# Altium PCB AlarmTimer_Layout.PcbDoc
Units mil, origin at the board's own origin, x right, y up, seen from the top; angles counter-clockwise.
Board outline 3149.61 x 2362.2 mil, 2 copper layers (Top Layer, Bottom Layer), stack 42.17 mil thick; 26 components, 22 nets, 95 pads, 5 vias.
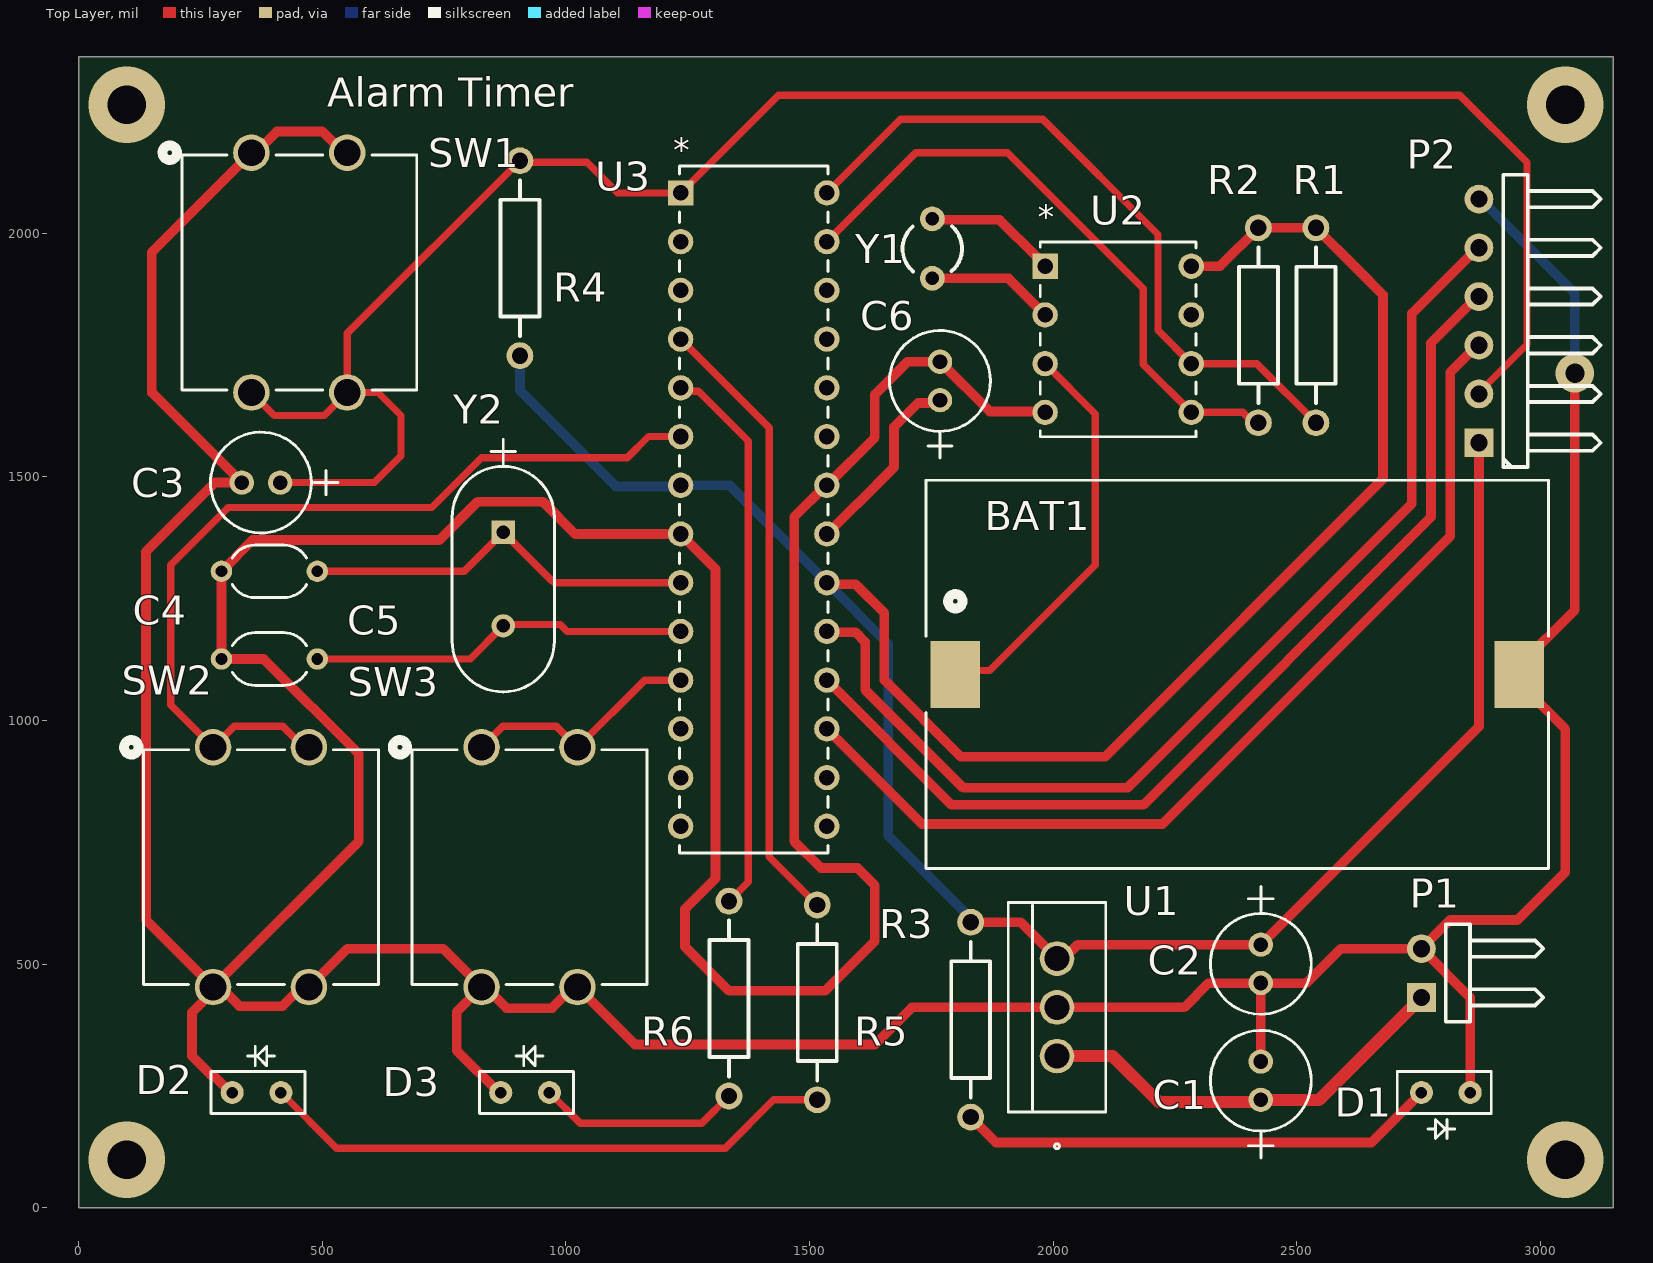
[diagram p0: Top Layer view]
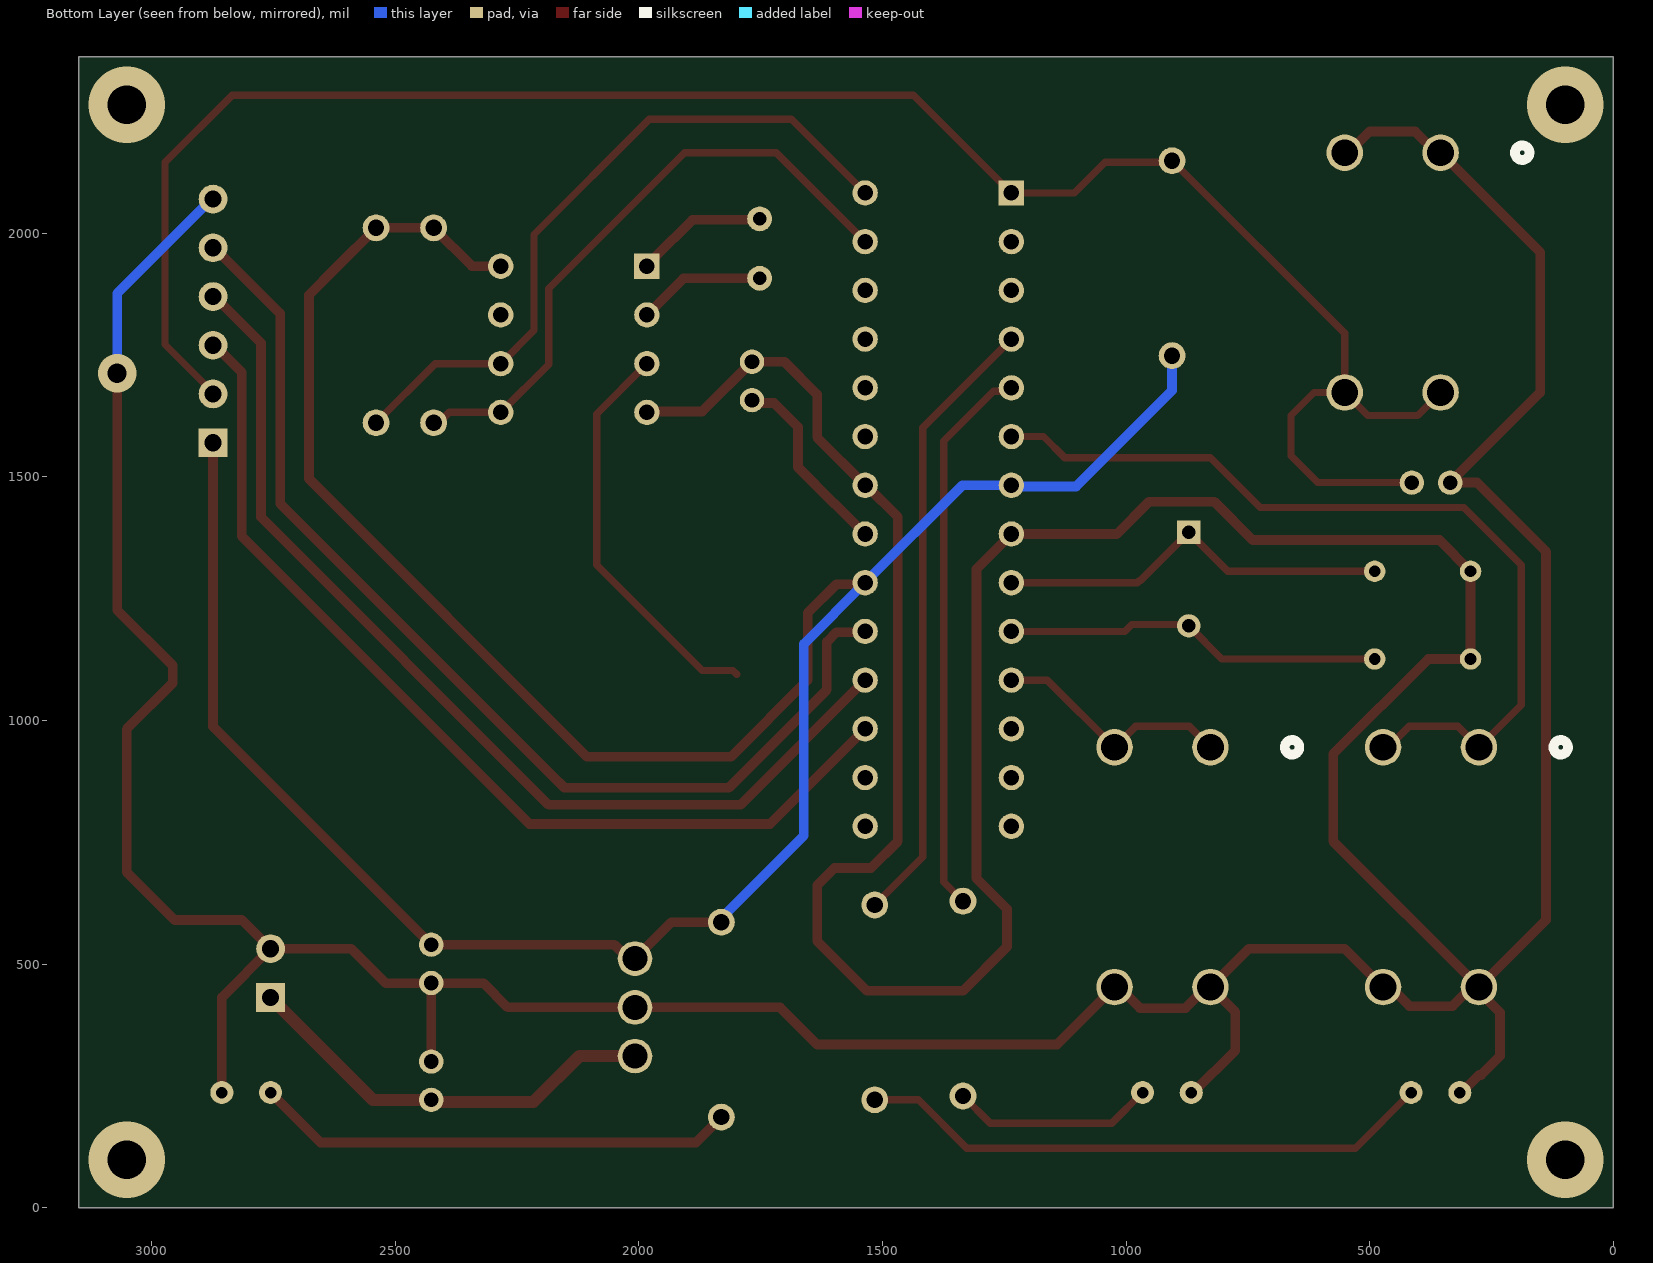
[diagram p1: Bottom Layer view, seen from below]
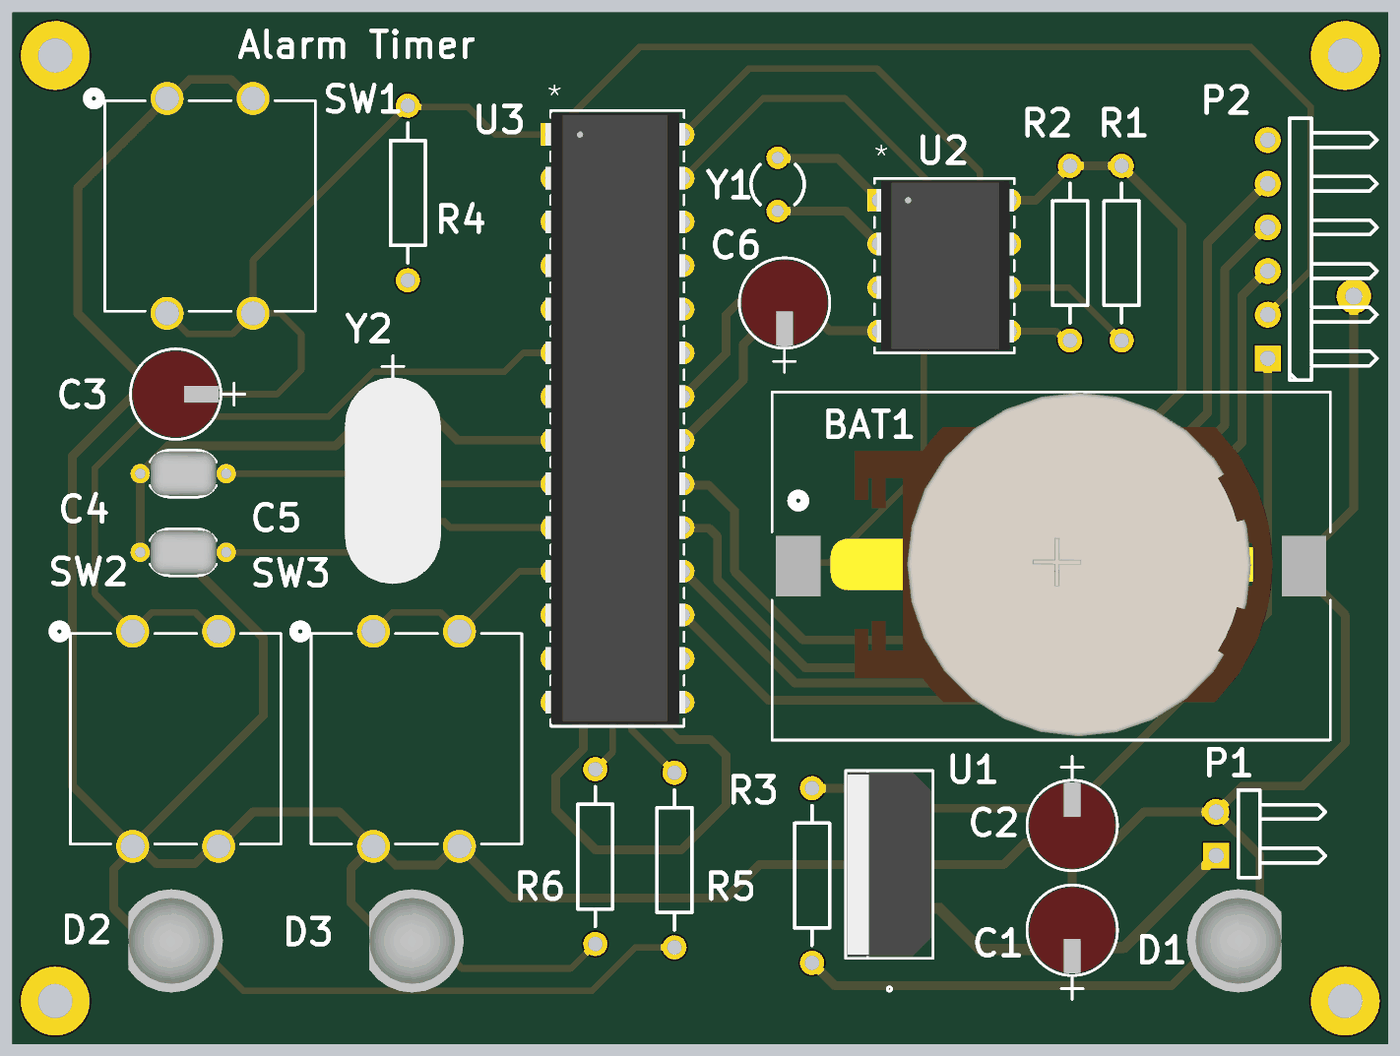
[diagram p2: 3D render of the assembled board from above, using the file's embedded part models]

## Layer stack, top to bottom
Top Solder: solder mask 0.4, Solder Resist, Dk 3.5
Top Layer: signal copper 1.4
Dielectric 1: dielectric 39.3701, FR-4, Dk 4.8
Bottom Layer: signal copper 1.4
Bottom Solder: solder mask 0.4, Solder Resist, Dk 3.5

## Board outline
0,0 3149.61,0 3149.61,2362.2 0,2362.2

## Design rules (kind name [scope] priority, off if disabled: settings)
Clearance [All] p1: gap=8 ignorepadtopadclearanceinfootprint=TRUE
PolygonConnect [All] p1: connectstyle=Relief reliefconductorwidth=10 reliefentries=4 polygonreliefangle="90 Angle" airgapwidth=10
RoutingVias [All] p1: holewidth=28 width=50 viastyle="Through Hole" minholewidth=28 minwidth=50 maxholewidth=118.11 maxwidth=196.85
SolderMaskExpansion [All] p1: expansion=4 istentingtop=FALSE
Width Width_1 [InNet('5V') or InNet('GND') or InNet('VCC')] p1: maxlimit=30 minlimit=15 preferedwidth=20
Width [All] p2: maxlimit=20 minlimit=10 preferedwidth=15 minimp=50.000000 maximp=50.000000 favimp=50.000000
30 further rules are at their usual default settings.

## Components (designator, comment, footprint, x,y, rotation, side; value= is the part's Value field where it differs from the comment)
BAT1 "CR2032" BAT_SMTU2032_RNB 1799.21,1094.49 r0 top
C1 "300nF" CAP_UEP_5X11_NCH 2426.26,221.06 r90 top
C2 "100nF" CAP_UEP_5X11_NCH 2426.26,539.8 r270 top
C3 "100nF" CAP_UEP_5X11_NCH 413.39,1488.19 r180 top
C4 "22pF" CAP_FA28_TDK 391.26,1306.06 r0 top
C5 "22pF" CAP_FA28_TDK 391.26,1126.06 r0 top
C6 "100nF" CAP_UEP_5X11_NCH 1767.72,1657.48 r90 top
D1 "PowerLED" LED 2855.91,236.22 r180 top
D2 "AlarmLED" LED 314.96,236.22 r0 top
D3 "SnoozeLED" LED 866.14,236.22 r0 top
P1 "Power Conector" HDR1X2H 2755.91,431.5 r90 top
P2 "USBASP Connector" HDR1X6H 2874.02,1570.08 r90 top
R1 "10k" AXIAL-0.4 2539.37,1811.02 r270 top
R2 "10k" AXIAL-0.4 2421.26,1811.02 r270 top
R3 "" AXIAL-0.4 1830.71,385.83 r270 top value=330R
R4 "" AXIAL-0.4 905.51,1948.82 r270 top value=10k
R5 "" AXIAL-0.4 1515.75,421.26 r270 top value=220R
R6 "" AXIAL-0.4 1334.65,429.13 r270 top value=220R
SW1 "TL1100FF160Q" TL1100F 354.33,2165.35 r0 top
SW2 "TL1100FF160Q" TL1100F 275.59,944.88 r0 top
SW3 "TL1100FF160Q" TL1100F 826.77,944.88 r0 top
U1 "LM7805" TO-220_FAS 2007.87,311.02 r90 top
U2 "DS1307" 21-0043D_8_MXM 1983.46,1932.28 r0 top
U3 "ATMEGA328-PU" 28P3_SPDIP28_SP_MCH 1235.43,2082.68 r0 top
Y1 "XTAL" R38 1751.97,1968.5 r0 top
Y2 "16MHz" XTAL_ABL_ABR 871.26,1386.06 r270 top

## Footprints (in the part's own frame and the unit in brackets; to place one, negate y for a bottom-side part, rotate by r counter-clockwise, add the part's x,y. Pads: shape width x height; smd on the part's side, far side on the other; paste and mask are expansions set on the pad)
21-0043D_8_MXM [mil]
  rect 52x52 hole 32 mask+0: 1(0,0)
  round 52 hole 32 mask+0: 2(0,-100) 3(0,-200) 4(0,-300) 5(300,-300) 6(300,-200) 7(300,-100) 8(300,0)
  silkscreen extent -10,-350 310,50, body extent -5,-345 310,45, height 185
28P3_SPDIP28_SP_MCH [mil]
  rect 52x52 hole 32 mask+0: 1(0,0)
  round 52 hole 32 mask+0: 2(0,-100) 3(0,-200) 4(0,-300) 5(0,-400) 6(0,-500) 7(0,-600) 8(0,-700) 9(0,-800) 10(0,-900) 11(0,-1000) 12(0,-1100) 13(0,-1200) 14(0,-1300) 15(300,-1300) 16(300,-1200) 17(300,-1100) 18(300,-1000) 19(300,-900) 20(300,-800) 21(300,-700) 22(300,-600) 23(300,-500) 24(300,-400) 25(300,-300) 26(300,-200) 27(300,-100) 28(300,0)
  silkscreen extent -2,-1355 302,55, body extent -15,-1350 304,50, height 205
AXIAL-0.4 [mm] "Axial Device, Thru-Hole; 2 Leads; 0.4 in Pin Spacing"
  round 1.4 hole 0.85: 1(-5.08,0) 2(5.08,0)
  silkscreen extent -4.06,-1.02 4.06,1.02
BAT_SMTU2032_RNB [mil]
  rect 102x138 smd paste+0 mask+0: 1(0,0) 2(1157.48,0)
  silkscreen extent -60,-398 1218,398, body extent 0,-390 1086,397, height 236
CAP_FA28_TDK [mil]
  round 44 hole 24 mask+0: 1(-98.43,0) 2(98.43,0)
  silkscreen extent -76,-54 76,54, body extent -75,-50 75,50, height 243
CAP_UEP_5X11_NCH [mil]
  round 50 hole 30 mask+0: 1(0,0) 2(78.74,0)
  silkscreen extent -119,-104 143,103, body extent -60,-98 138,98, height 493
HDR1X2H [mm] "Connector; Header; 2 Position; Right Angle"
  rect 1.5x1.5 hole 0.9: 1(0,0)
  round 1.5 hole 0.9: 2(2.54,0)
  silkscreen extent -1.27,-6.35 3.81,-1.27
HDR1X6H [mm] "Connector; Header; 6 Position; Right Angle"
  rect 1.5x1.5 hole 0.9: 1(0,0)
  round 1.5 hole 0.9: 2(2.54,0) 3(5.08,0) 4(7.62,0) 5(10.16,0) 6(12.7,0)
  silkscreen extent -1.27,-6.35 13.97,-1.27
LED [mm]
  round 1.2 hole 0.6: 1(0,0) 2(2.54,0)
  silkscreen extent -1.1,-1.1 3.8,2.4, body extent -1.25,-3 4.25,3, height 8.94
R38 [mm] "Crystal, Thru-Hole; 2 Leads; Body 3.1 x 8.2 mm (Dia.xH)"
  round 1.3 hole 0.7: 1(0,1.55) 2(0,-1.55)
  silkscreen extent -1.55,-1.19 1.55,1.17
TL1100F [mil]
  round 75 hole 55 mask+0: 1(0,0) 2(0,-492.13) 3(196.85,0) 4(196.85,-492.13)
  silkscreen extent -183,-487 339,15, body extent -141,-531 331,21, height 329
TO-220_FAS [mil]
  round 71 hole 51 mask+0: 1(0,0) 2(100,0) 3(200,0)
  silkscreen extent -190,-100 315,100, body extent -110,-95 310,95, height 650
XTAL_ABL_ABR [mil]
  rect 48x48 hole 28 mask+0: 1(0,0)
  round 48 hole 28 mask+0: 2(192,0)
  silkscreen extent -190,-105 328,105, body extent -141,-110 332,110, height 138

## Part data
BAT1: library part SMTU2032, "No Description Available", Built_By=EMA_Justin, Copyright="Copyright (C) 2018 Accelerated Designs. All rights reserved", Datasheet=https://www.mouser.com/datasheet/2/346/SMTU2032-C-258020.pdf, Manufacturer_Part_Number=SMTU2032, RefDes=RefDes, SourceLibrary=Add_to_database_2020-12-24, Type=DEV, Vendor="Renata Batteries"
C1 C2 C3 C6: library part "Cap Pol", "No Description Available", Manufacturer_Part_Number=UFW2A0R1MDD1TD, Built_By=EMA_Cory, Copyright="Copyright (C) 2018 Accelerated Designs. All rights reserved", RefDes=RefDes, SourceLibrary=Nichicon_2019-09-13, Type=DEV, Vendor=Nichicon
C4 C5: library part FA28C0G1H220JNU00, "No Description Available", Built_By=EMA_Matt, Copyright="Copyright (C) 2018 Accelerated Designs. All rights reserved", Manufacturer_Part_Number=FA28C0G1H220JNU00, RefDes=RefDes, SourceLibrary=TDK_2019-10-09, Type=DEV, Vendor=TDK
D1 D2 D3: library part LED
P1: library part "Header 2H", "Header, 2-Pin, Right Angle", LatestRevisionDate=17-Jul-2002, LatestRevisionNote="Re-released for DXP Platform.", Publisher="Altium Limited"
P2: library part "Header 6H", "Header, 6-Pin, Right Angle", LatestRevisionDate=17-Jul-2002, LatestRevisionNote="Re-released for DXP Platform.", Publisher="Altium Limited"
R1 R2 R3 R4 R5 R6: library part Res2, "Resistor", LatestRevisionDate=17-Jul-2002, LatestRevisionNote="Re-released for DXP Platform.", PackageDescription="Axial Device, Thru-Hole; 2 Leads; 0.4 in Pin Spacing", PackageReference=AXIAL-0.4, Published=8-Jun-2000, Publisher="Altium Limited"
SW1 SW2 SW3 U3: "No Description Available", Built_By=EMA_Cory, Copyright="Copyright (C) 2018 Accelerated Designs. All rights reserved", RefDes=RefDes, Type=DEV
  SW1 SW2 SW3: Datasheet=https://sten-eswitch-13110800-production.s3.amazonaws.com/system/asset/product_line/data_sheet/143/TL1100.pdf, Manufacturer_Part_Number=TL1100FF160Q, SourceLibrary=E-Switch_2020-03-31, Vendor=E-Switch
  U3: Datasheet=https://ww1.microchip.com/downloads/en/DeviceDoc/ATmega48A-PA-88A-PA-168A-PA-328-P-DS-DS40002061B.pdf, Manufacturer_Part_Number=ATMEGA328-PU, SourceLibrary=Update_to_database_2021-05-13, Vendor=Microchip
U1: library part LM7805CT, "No Description Available", Built_By=EMA_UL_Team, Copyright="Copyright (C) 2018 Accelerated Designs. All rights reserved", Manufacturer_Part_Number=LM7805CT, RefDes=RefDes, SourceLibrary=Fairchild_2008-01-01_, Type=DEV, Vendor="Fairchild Semiconductor"
U2: library part DS1307+, "No Description Available", Built_By=EMA_UL_Team, Copyright="Copyright (C) 2018 Accelerated Designs. All rights reserved", Manufacturer_Part_Number=DS1307+, RefDes=RefDes, SourceLibrary=Maxim_2011-05-13, Type=DEV, Vendor="Maxim Integrated Products"
Y1: "Crystal Oscillator", LatestRevisionDate=17-Jul-2002, LatestRevisionNote="Re-released for DXP Platform.", PackageDescription="Crystal, Thru-Hole; 2 Leads; Body 3.1 x 8.2 mm (Dia.xH)", PackageReference=R38, Published=8-Jun-2000, Publisher="Altium Limited"
Y2: "No Description Available", Manufacturer_Part_Number=ABL-20.000MHZ-B2, Built_By=EMA_Cory, Copyright="Copyright (C) 2018 Accelerated Designs. All rights reserved", Datasheet=https://abracon.com/Resonators/ABL.pdf, RefDes=RefDes, SourceLibrary=Add_to_database_2020-12-08, Type=DEV, Vendor=Abracon

## Via types
v1: diameter 157.48, hole 78.74, Top Layer to Bottom Layer, 4 vias
v2: diameter 78.74, hole 39.37, Top Layer to Bottom Layer, 1 vias

## Nets (pads, with @x,y where several pads share a name; then routed paths per layer and width w, separated by ;. In a path a pad name is that pad's centre, name@x,y a point inside that pad or via, vN(x,y) a via of type N, cw(c..) or ccw(c..) an arc to the next point about the centre after c; other vN are vias at no path point)
5V: C2.1 P2.1 R1.1 R2.1 R3.1 R4.2 U1.3 U2.8 U3.7 U3.20 | length 6016
  Top Layer w20: R4.2 R4.2@910.51,1748.82 ; U3.20 1538.58,1279.53 1594.49,1279.53 1653.54,1220.47 1653.54,1082.68 1811.02,925.2 2106.3,925.2 2677.17,1496.06 2677.17,1873.23 2621.26,1929.13 R1.1 R2.1 2342.52,1932.28 U2.8 ; R3.1 1933.07,585.83 U1.3 2021.67,511.02 2050.45,539.8 C2.1 2874.02,987.56 P2.1@2874.02,1573.23
  Bottom Layer w20: R4.2 905.51,1677.17 1102.36,1480.32 1233.07,1480.32 U3.7 1335.43,1482.68 U3.20 1661.42,1156.69 1661.42,763.78 1830.71,594.49 R3.1
ALARM_LED: R5.1 U3.4 | length 1277.5
  Top Layer w15: U3.4 1417.32,1600.79 1417.32,719.68 R5.1
GND: BAT1.2 C1.2 C2.2 C3.2 C4.1 C5.1 C6.2 D1.1 D2.1 D3.1 P1.2 P2.6 SW1.1 SW1.3 SW2.2 SW2.4 SW3.2 SW3.4 U1.2 U2.4 U3.8 U3.22 | length 13250.2
  Top Layer w20: D2.1 311.17,236.22 275.15,272.24 271.06,272.24 232.28,311.02 232.28,400.6 275.59,443.91 SW2.2 ; SW1.3 543.31,2165.35 500,2208.66 406.48,2208.66 363.18,2165.35 SW1.1 150,1961.02 150,1672.83 C3.2 279.53,1488.19 137.8,1346.46 137.8,590.55 SW2.2 ; D3.1 862.11,236.22 775.59,322.74 775.59,401.57 SW3.2 ; U2.4 1981.89,1633.86 1870.08,1633.86 C6.2 1700.79,1736.22 1633.86,1669.29 1633.86,1581.1 U3.22 1533.86,1482.68 1468.5,1417.32 1468.5,751.97 1523.62,696.85 1598.43,696.85 1633.86,661.42 1633.86,547.24 1531.5,444.88 1334.65,444.88 1244.09,535.43 1244.09,612.91 1307.09,675.9 1307.09,1311.02 U3.8 1018.96,1382.68 952.82,1448.82 818.9,1448.82 740.16,1370.08 356.85,1370.08 C4.1 C5.1 379.65,1126.06 574.8,930.91 574.8,751.97 SW2.2 ; C1.2 C2.2 ; D1.1 2855.91,431.5 P1.2 ; v2(3070.87,1712.6) 3070.87,1226.66 2956.69,1112.49 BAT1.2 2956.69,1076.49 3051.18,982 3051.18,688.98 2952.76,590.55 2814.96,590.55 P1.2 ; SW2.2 290.47,452.76 329.84,413.39 418.19,413.39 457.56,452.76 SW2.4 551.18,531.5 748.03,531.5 SW3.2 ; SW3.2 834.65,452.76 877.95,409.45 971.47,409.45 1014.78,452.76 SW3.4 1141.73,334.65 1633.86,334.65 1710.24,411.02 U1.2 2269.29,411.02 2318.9,460.63 2425.83,460.63 C2.2 ; C2.2 2426.69,460.63 2519.68,460.63 2590.55,531.5 P1.2
  Bottom Layer w20: P2.6@2877.17,2070.08 3070.87,1876.38 v2(3070.87,1712.6)
MISO: P2.4 U3.18 | length 2087.4
  Top Layer w20: U3.18 1791.34,826.77 2185.04,826.77 2775.59,1417.32 2775.59,1774.8 P2.4@2874.02,1873.23
MOSI: P2.3 U3.17 | length 2024.8
  Top Layer w20: U3.17 1730.71,787.4 2224.41,787.4 2814.96,1377.95 2814.96,1714.17 P2.3@2874.02,1773.23
NetBAT1_1: BAT1.1 U2.3 | length 836.5
  Top Layer w15: BAT1.1 1807.09,1102.36 1870.08,1102.36 2086.61,1318.9 2086.61,1629.13 U2.3
NetC4_2: C4.2 U3.9 Y2.1 | length 821.7
  Top Layer w15: C4.2 791.26,1306.06 Y2.1 969.93,1287.4 972.45,1287.4 977.17,1282.68 U3.9
NetC5_2: C5.2 U3.10 Y2.2 | length 780.9
  Top Layer w15: C5.2 803.26,1126.06 Y2.2 874.05,1196.85 988.19,1196.85 1002.36,1182.68 U3.10
NetC6_1: C6.1 U3.21 | length 394.5
  Top Layer w20: U3.21 1597.16,1444.4 1597.94,1444.4 1673.23,1519.68 1673.23,1602.36 1722.61,1651.74 1761.98,1651.74 C6.1
NetD1_2: D1.2 R3.2 | length 989.1
  Top Layer w20: R3.2 1882.68,133.86 2653.54,133.86 D1.2
NetD2_2: D2.2 R5.2 | length 1189.2
  Top Layer w15: D2.2 529.13,122.05 1326.77,122.05 1425.98,221.26 R5.2
NetD3_2: D3.2 R6.2 | length 417.8
  Top Layer w15: D3.2 1029.13,173.23 1278.74,173.23 R6.2
NetU2_1: U2.1 Y1.1 | length 272.7
  Top Layer w20: Y1.1 1753.94,2027.56 1889.76,2027.56 1967.46,1949.86 1967.46,1948.28 U2.1
NetU2_2: U2.2 Y1.2 | length 262.6
  Top Layer w20: Y1.2 1908.27,1907.48 U2.2
RESET: C3.1 P2.2 R4.1 SW1.2 SW1.4 U3.1 | length 4089.5
  Top Layer w15: SW1.2 401.57,1625.98 503.94,1625.98 SW1.4 ; C3.1 606.3,1488.19 661.42,1543.31 661.42,1625.98 614.17,1673.23 SW1.4 ; P2.2@2874.02,1673.23 2972.44,1771.65 2972.44,2145.67 2834.65,2283.46 1436.22,2283.46 U3.1 1106.3,2082.68 1043.31,2145.67 908.66,2145.67 R4.1 551.18,1794.49 SW1.4
SCK: P2.5 U3.19 | length 2218.3
  Top Layer w20: U3.19 1537.01,1181.1 1594.49,1181.1 1614.17,1161.42 1614.17,1062.99 1815.39,861.77 2153.01,861.77 2177.07,885.83 2736.22,1444.98 2736.22,1835.43 P2.5@2874.02,1973.23
SCL: R1.2 U2.6 U3.28 | length 1439.8
  Top Layer w15: U3.28 1686.54,2233.78 1978.82,2233.78 2215.04,1997.56 2215.04,1800.71 U2.6 2418.11,1732.28 R1.2
SDA: R2.2 U2.5 U3.27 | length 1282.5
  Top Layer w15: U3.27 1718.11,2165.35 1906.39,2165.35 2185.04,1886.71 2185.04,1730.71 U2.5 2389.14,1632.28 2410.4,1611.02 R2.2
SNOOZE_BTN: SW3.1 SW3.3 U3.11 | length 565.8
  Top Layer w15: SW3.1@831.77,949.88 870.08,988.19 ; SW3.1@836.77,944.88 SW3.1 870.08,988.19 ; U3.11 1161.42,1082.68 SW3.3 980.32,988.19 870.08,988.19
SNOOZE_LED: R6.1 U3.5 | length 1144.5
  Top Layer w15: U3.5 1242.51,1675.6 1271.94,1675.6 1374.02,1573.52 1374.02,668.5 R6.1
STOP_BTN: SW2.1 SW2.3 U3.6 | length 1798.3
  Top Layer w15: SW2.3 461.91,944.88 418.61,988.19 318.9,988.19 SW2.1 188.98,1031.5 188.98,1318.9 307.09,1437.01 724.41,1437.01 826.77,1539.37 1125.98,1539.37 1169.29,1582.68 U3.6
VCC: C1.1 P1.1 U1.1 | length 876.2
  Top Layer w25: U1.1 2122.05,311.02 2216.54,216.54 2421.73,216.54 C1.1 2545.47,221.06 P1.1
pads on no net: U2.7 U3.2 U3.3 U3.12 U3.13 U3.14 U3.15 U3.16 U3.23 U3.24 U3.25 U3.26
copper on no net:
  other v1: 98.43,98.43 3051.18,98.43 98.43,2263.78 3051.18,2263.78

## Silkscreen, mask and mechanical layers (free items; w line width, h text height)
Top Overlay:
  text "Alarm Timer" at 510,2260 h60

## Text inside footprints (layer, text, board x,y; h text height)
U1: Mechanical 13 "TAB" at 1950.3,392.27 h25 r90
U2: Top Overlay "*" at 1968.5,2007.87 h50; Mechanical 13 "*" at 1975.96,1907.28 h50
U3: Top Overlay "*" at 1220.47,2145.67 h50; Mechanical 13 "*" at 1235.43,2057.68 h50